# EAGLE board ControlModule (EAGLE 7.2.0)
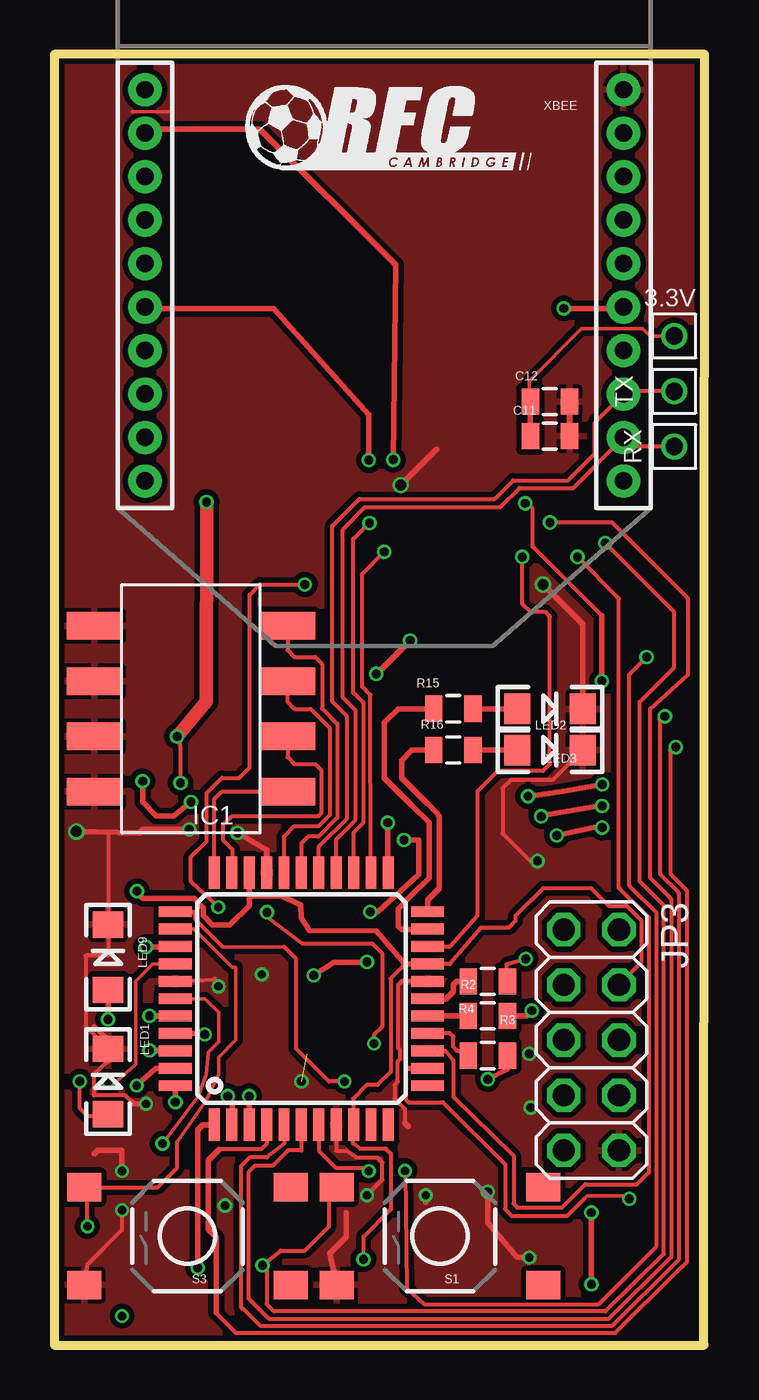
[diagram p0: board, top side]
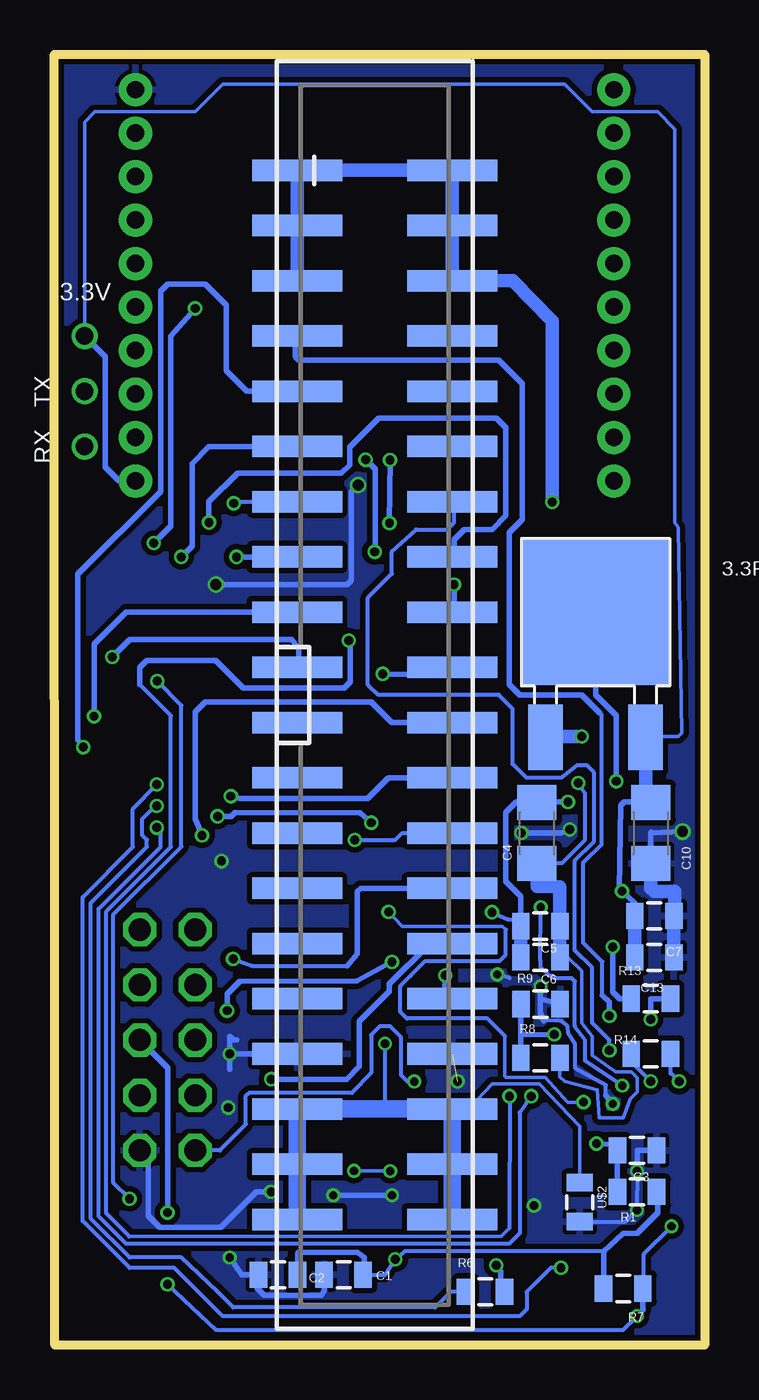
[diagram p1: board, bottom side, seen from below]

Size 29.9 x 59.38 mm. Coordinates in mm from the lower left corner, seen from the top.
Outline: 0,59.38 0,0 29.87,0 29.9,59.38 0,59.38
Copper layers (1*16): Top 0.018mm / dielectric 1.55mm / Bottom 0.018mm
Design rules "eC_2Layer_PClass6_BaseCopperO18_eCDefault": minimum track width 0.15mm, minimum drill 0.35mm, track to track 0.15mm, track to pad 0.15mm, pad to pad 0.15mm, via to via 0.15mm, smd to smd 0mil, copper to edge 0.25mm, drill to drill 0.35mm, minimum pad ring 0.175mm, minimum via ring 0.125mm, stop-mask expansion 0mil, vias tented up to drill 0.45mm, thermal gap 0.2mm

## Footprints (pad centres in the part's own frame; a part is rotated, then mirrored left to right if it is on the bottom)
DPAK = smd 6.7 x 6.7: DRAIN 0,0 | smd 3 x 1.6: GATE 5.75,-2.3; SOURCE 5.75,2.3
TESTING_PT = drill 0.8: P$1 0,0
0805 = smd 0.8 x 1.2: 1 -0.9,0; 2 0.9,0
1206 = smd 1.6 x 1.8: 1 -1.4,0; 2 1.4,0
TQFP44 = smd 1.5 x 0.5: 1 -5.8,4; 2 -5.8,3.2; 3 -5.8,2.4; 4 -5.8,1.6; 5 -5.8,0.8; 6 -5.8,0; 7 -5.8,-0.8; 8 -5.8,-1.6; 9 -5.8,-2.4; 10 -5.8,-3.2; 11 -5.8,-4; 23 5.8,-4; 24 5.8,-3.2; 25 5.8,-2.4; 26 5.8,-1.6; 27 5.8,-0.8; 28 5.8,0; 29 5.8,0.8; 30 5.8,1.6; 31 5.8,2.4; 32 5.8,3.2; 33 5.8,4 | smd 0.5 x 1.5: 12 -4,-5.8; 13 -3.2,-5.8; 14 -2.4,-5.8; 15 -1.6,-5.8; 16 -0.8,-5.8; 17 0,-5.8; 18 0.8,-5.8; 19 1.6,-5.8; 20 2.4,-5.8; 21 3.2,-5.8; 22 4,-5.8; 34 4,5.8; 35 3.2,5.8; 36 2.4,5.8; 37 1.6,5.8; 38 0.8,5.8; 39 0,5.8; 40 -0.8,5.8; 41 -1.6,5.8; 42 -2.4,5.8; 43 -3.2,5.8; 44 -4,5.8
2X20_SHROUDED_SMT = smd 4.14 x 0.991: 1 -3.569,24.13; 2 3.569,24.13; 3 -3.569,21.59; 4 3.569,21.59; 5 -3.569,19.05; 6 3.569,19.05; 7 -3.569,16.51; 8 3.569,16.51; 9 -3.569,13.97; 10 3.569,13.97; 11 -3.569,11.43; 12 3.569,11.43; 13 -3.569,8.89; 14 3.569,8.89; 15 -3.569,6.35; 16 3.569,6.35; 17 -3.569,3.81; 18 3.569,3.81; 19 -3.569,1.27; 20 3.569,1.27; 21 -3.569,-1.27; 22 3.569,-1.27; 23 -3.569,-3.81; 24 3.569,-3.81; 25 -3.569,-6.35; 26 3.569,-6.35; 27 -3.569,-8.89; 28 3.569,-8.89; 29 -3.569,-11.43; 30 3.569,-11.43; 31 -3.569,-13.97; 32 3.569,-13.97; 33 -3.569,-16.51; 34 3.569,-16.51; 35 -3.569,-19.05; 36 3.569,-19.05; 37 -3.569,-21.59; 38 3.569,-21.59; 39 -3.569,-24.13; 40 3.569,-24.13
2X05 = drill 1.016 octagon: 1 -5.08,-1.27; 2 -5.08,1.27; 3 -2.54,-1.27; 4 -2.54,1.27; 5 0,-1.27; 6 0,1.27; 7 2.54,-1.27; 8 2.54,1.27; 9 5.08,-1.27; 10 5.08,1.27
LED-1206 = smd 1.2 x 1.4: A -1.5,0; C 1.5,0
TACTILE-SWITCH-SMD = smd 1.55 x 1.3: 1 -4.75,2.25; 2 4.75,2.25; 3 -4.75,-2.25; 4 4.75,-2.25
4-POS-DIP-SMD = smd 1.27 x 2.54: 1 -3.81,4.445; 2 -1.27,4.445; 3 1.27,4.445; 4 3.81,4.445; 5 3.81,-4.445; 6 1.27,-4.445; 7 -1.27,-4.445; 8 -3.81,-4.445
XBEE-1 = drill 0.8 pad 1.524: 1 -11,20; 2 -11,18; 3 -11,16; 4 -11,14; 5 -11,12; 6 -11,10; 7 -11,8; 8 -11,6; 9 -11,4; 10 -11,2; 11 11,2; 12 11,4; 13 11,6; 14 11,8; 15 11,10; 16 11,12; 17 11,14; 18 11,16; 19 11,18; 20 11,20

## Placement (x,y rotation side)
3.3REG  3.3REG1AREG  [DPAK]  5.01,33.72 270 bottom
3.3V  TEST_PT  [TESTING_PT]  28.51,46.42 0 top
C1  1uF  [0805]  16.6,3.24 180 bottom
C2  0.01uF  [0805]  19.62,3.24 180 bottom
C3  0.1uF  [0805]  3.11,8.95 180 bottom
C4  47uF  [1206]  7.71,23.56 90 bottom
C5  1uF  [0805]  7.55,19.27 180 bottom
C6  0.01uF  [0805]  7.55,17.84 180 bottom
C7  0.01uF  [0805]  2.31,19.75 0 bottom
C10  47uF  [1206]  2.47,23.56 270 bottom
C11  0.01uF  [0805]  22.79,41.82 180 top
C12  1uF  [0805]  22.79,43.4 180 top
C13  1uF  [0805]  2.31,17.84 0 bottom
FRAME1  FRAME-LETTER  [CREATIVE_COMMONS]  -115.64,74.36 0 top  (outside the outline)
IC1  XMEGA16A4A  [TQFP44]  11.36,15.94 90 top
JP1  M20X2SHROUDED_SMT  [2X20_SHROUDED_SMT]  15.17,29.91 0 bottom
JP3  DEBUG  [2X05]  24.7,14.03 270 top
LED1  [LED-1206]  2.47,12.13 90 top
LED2  [LED-1206]  22.79,29.27 0 top
LED3  [LED-1206]  22.79,27.37 0 top
LED9  [LED-1206]  2.47,17.84 90 top
R1  10k  [0805]  3.11,7.05 0 bottom
R2  4.7k  [0805]  19.93,15.15 0 top
R3  4.7k  [0805]  19.93,13.32 0 top
R4  4.7k  [0805]  19.93,16.73 0 top
R6  4.7k  [0805]  10.09,2.45 0 bottom
R7  10k  [0805]  3.74,2.6 180 bottom
R8  80.6k  [0805]  7.55,13.21 0 bottom
R9  20k  [0805]  7.54,15.69 180 bottom
R13  1k  [0805]  2.47,15.94 180 bottom
R14  1k  [0805]  2.47,13.4 180 bottom
R15  1k  [0805]  18.34,29.27 180 top
R16  1k  [0805]  18.34,27.37 180 top
RX  TEST_PT  [TESTING_PT]  28.51,41.34 90 top
S1  TAC_SWITCHSMD  [TACTILE-SWITCH-SMD]  17.73,5.02 180 top
S3  TAC_SWITCHSMD  [TACTILE-SWITCH-SMD]  6.12,5.02 180 top
TX  TEST_PT  [TESTING_PT]  28.51,43.88 90 top
U$1  4-POS-DIP  [4-POS-DIP-SMD]  6.28,29.27 270 top
U$2  INDUCTOR  [0805]  5.73,6.58 270 bottom
XBEE  XBEE-1B1  [XBEE-1]  15.17,59.75 180 top

## Library data of the parts
3.3REG 3.3V RX TX U$2 = gen3
C1-C7 C10-C13 = SparkFun-Capacitors
FRAME1 = SparkFun-Aesthetics
IC1 = atmel; OC_FARNELL: unknown; OC_NEWARK: unknown
JP1 = SparkFun-Connectors
JP3 = pinhead
LED1-LED3 LED9 = SparkFun-LED
R1 R6-R9 R13-R16 = SparkFun-Passives
R2-R4 = SparkFun-Resistors
S1 S3 = SparkFun-Retired; PROD_ID: SWCH-08247
U$1 = SparkFun-Electromechanical; PROD_ID: SWCH-12418
XBEE = SparkFun-RF

## Nets
3.3V: 3.3REG.SOURCE 3.3V.P$1 C1.1 C2.1 C7.1 C10.1 C11.2 C12.2 C13.1 IC1.9 IC1.19 IC1.31 JP3.4 R1.2 R7.2 XBEE.1
12V: 3.3REG.GATE C4.1 C5.1 C6.1 JP1.1 JP1.2 JP1.3 JP1.4 JP1.5 JP1.6 R8.2
12VGND: 3.3REG.DRAIN C4.2 C5.2 C6.2 JP1.35 JP1.36 JP1.37 JP1.38 JP1.39 JP1.40 U$2.1
AVCC: C3.2 IC1.39 R1.1
BATSENSE: IC1.41 R8.1 R9.2
BB_IN: IC1.40 JP1.7
BB_OUT: IC1.4 JP1.9
BID0: IC1.28 U$1.1
BID1: IC1.29 U$1.2
BID2: IC1.32 U$1.3
BID3: IC1.33 U$1.4
CHARGE: IC1.7 JP1.19
CHARGE_DONE: IC1.5 JP1.17
CHIP_ENABLE: IC1.13 JP1.13
CTS: IC1.24 XBEE.12
DATA: IC1.34 JP3.9
DISCHARGE: IC1.6 JP1.16
DIVCAP: IC1.42 JP1.14
DRIB: IC1.43 JP1.18
GLED1: IC1.36 R13.2
GLED2: IC1.21 R15.2
GND: C1.2 C2.2 C3.1 C7.2 C10.2 C11.1 C12.1 C13.2 IC1.8 IC1.18 IC1.30 IC1.38 JP1.33 JP1.34 JP3.10 LED1.C LED2.C LED3.C LED9.C R9.1 S1.2 S3.2 U$1.5 U$1.6 U$1.7 U$1.8 U$2.2 XBEE.10
KICK_ENABLE: IC1.14 JP1.11
KICK_REF: IC1.20 JP1.15
MISO: IC1.16 R2.1
MOSI: IC1.15 R3.1
N$1: JP1.32 R2.2
N$2: LED9.A R13.1
N$3: JP1.30 R3.2
N$5: IC1.23 R6.1
N$8: JP1.28 R4.2
N$9: LED1.A R14.1
N$10: LED2.A R15.1
N$11: LED3.A R16.1
RESET: IC1.35 JP3.6 R7.1 S3.4
RLED1: IC1.37 R14.2
RLED2: IC1.22 R16.2
RTS: IC1.25 XBEE.16
RX: IC1.26 RX.P$1 XBEE.2
SCK: IC1.17 R4.1
SS_1: IC1.3 JP1.20
SS_2: IC1.2 JP1.22
SS_3: IC1.1 JP1.24
SS_4: IC1.44 JP1.26
TX: IC1.27 TX.P$1 XBEE.3
XBRST: R6.2 S1.4 XBEE.5

## Tracks (layer width: path | path; a pad name or v marks a point on that pad's centre or on a via)
3.3V  (via drill 0.41 pad 0.25)
  Top 0.152: 3.3V.P$1 27.39,46.42 27.06,46.75 24.23,46.75 21.84,44.36 21.84,43.61
  Top 0.178: 16.13,17.54 15.46,16.86 15.46,12.58 14.85,11.97 14.38,11.97 13.74,11.34 13.74,10.16 | v14.22,3.95 14.22,4.99 15.47,6.24 15.47,8.81 15.25,9.03 14.06,9.03 13.74,9.27 13.74,10.12 | 17.17,17.53 18.19,17.53 19.62,19.19 20.88,19.19 21.2,19.51 21.2,19.75 22.47,21.02 24.7,21.02 25.5,20.21 26.31,20.21 26.99,19.53 26.99,17.6 JP3.4
  Top 0.254: 21.84,43.61 C12.2 C11.2 | 8.96,20.88 8.98,20.54 | 13.74,10.16 IC1.9 13.74,10.12 | IC1.31 8.96,20.88 | 8.96,20.67 8.96,20.21 8.08,19.32 7.27,19.32 7.27,19.34 6.85,19.76 6.85,20.12 6.43,20.54 4.06,20.54 v3.8,20.89 | 17.17,17.53 IC1.19 16.13,17.54 16.11,17.54 14.8,19.07 11.72,19.07 11.35,19.64 11.34,20.25 10.44,20.67 8.96,20.67 | 8.96,20.67 8.96,20.88
  Bottom 0.152: 3.3V.P$1 28.51,56.26 28.03,56.75 23.43,56.75 22.16,58.01 6.44,58.01 5.17,56.75 2.15,56.75 1.36,55.94 1.36,37.85 1.2,37.61 1.04,28.16 1.2,28 2.68,28
  Bottom 0.178: C1.1 14.69,3.24 v14.22,3.95 13.82,4.27 13.77,4.32 4.64,4.32
  Bottom 0.254: R7.2 4.64,4.32 3.74,5.14 3.11,5.14 2.15,6.1 2.15,7 R1.2 | C7.1 3.21,20.33 v3.8,20.89 3.91,21 3.85,24.84 3.7,24.99 2.5,24.99 | XBEE.1 26.92,39.75 27.55,40.39 27.55,45.47 3.3V.P$1 | 2.68,28 3.3REG.SOURCE | C2.1 18.72,4.22 18.66,4.27 15.96,4.27 15.65,4.03 15.65,3.29 C1.1
  Bottom 0.61: 3.3REG.SOURCE 2.71,25.2 2.5,24.99 C10.1 | C7.1 C13.1
12V  (via drill 0.41 pad 0.25)
  Top 0.178: v5.8,25.86 5.8,27.53 v5.65,28
  Top 0.61: v7,38.79 6.99,29.61 v5.65,28
  Bottom 0.152: C6.1 6.28,17.84 5.65,17.21 5.65,14.83 5.17,14.19 5.17,13.32 4.15,12.61 4.09,12.56 4.09,12.57 3.55,12.57 3.54,12.56 3.38,12.56 3.11,12.29 3.11,11.65 3.42,11.34 3.74,10.46 4.85,10.46 4.93,11.73 6.44,12.13 6.65,12.34 R8.2
  Bottom 0.178: v5.8,25.86 5.49,25.39 5.49,23.24 6.57,22.16 C4.1
  Bottom 0.61: C6.1 C5.1 6.65,20.6 6.65,21.07 7.69,21.1 7.69,21.61 C4.1 | JP1.5 JP1.3 JP1.1 JP1.2 JP1.4 JP1.6 8.82,48.96 6.99,47.11 v7,38.79 | v5.65,28 7.27,28 3.3REG.GATE
12VGND  (via drill 0.38, 0.41, 0.41 pad 0.25)
  Top 0.178: 14.69,14.19 v14.69,13.88 14.69,14.27 15.08,14.65 15.08,18.03 14.63,18.45 14.63,18.47 11.41,18.46 9.77,19.69 v9.78,19.91
  Top 0.254: v4.06,25.94 4.06,24.99 4.69,24.35 5.49,24.35 v6.28,24.99
  Bottom 0.152: U$2.1 5.73,10.06 7.59,12.01 9.75,12.01 10.84,10.86
  Bottom 0.178: 14.69,10.86 v14.69,13.88 | v9.78,19.91 9.06,19.59 8.42,19.59 | 10.84,10.86 JP1.36
  Bottom 0.254: 3.3REG.DRAIN 5.01,29.91 4.06,28.96 v4.06,25.94 | v6.28,24.99 7.52,24.99 C4.2 7.74,24.99 8.66,24.99 9.14,24.51 9.14,21.34 8.45,20.65 C5.2
  Bottom 0.406: 8.42,19.59 8.42,19.51 C5.2
  Bottom 0.61: C5.2 C6.2
  Bottom 0.813: JP1.39 JP1.37 JP1.35 14.69,10.86 JP1.36 JP1.38 JP1.40
AVCC  (via drill 0.41 pad 0.25)
  Top 0.152: 5.09,9.43 6.6,11.42 6.99,12.45 7.07,13.48 7.55,13.96 7.55,15.3 6.91,15.94 IC1.39
  Top 0.254: v4.97,9.27 5.09,9.43
  Bottom 0.254: R1.1 C3.2 4.01,9.22 v4.97,9.27
BATSENSE  (via drill 0.41 pad 0.25)
  Top 0.254: v6.91,14.29 6.91,14.34 IC1.41
  Bottom 0.254: R9.2 8.45,14.27 | R8.1 8.45,14.27 | 8.45,14.27 v6.91,14.29
BB_IN  (via drill 0.41 pad 0.25)
  Top 0.254: IC1.40 v4.38,15.14 v4.38,15.15
  Bottom 0.178: 4.69,16.1 4.69,17.64 5.59,18.53 5.59,22.19 4.73,23.04 4.73,29 4.81,29.08
  Bottom 0.254: v4.38,15.15 4.38,15.78 4.69,16.1 | 4.81,29.08 5.65,29.91 8.5,29.91 8.98,30.39 8.98,37.37 8.38,37.97 8.38,44.23 9.46,45.31 18.66,45.31 18.82,45.47 18.82,46.34 JP1.7
BB_OUT  (via drill 0.41 pad 0.25)
  Top 0.178: IC1.4 9.76,9.26 9.51,9.01 7.58,9.01 | 28.65,3.39 25.8,0.56 8.34,0.56 7.44,1.46 7.44,1.5 | 28.65,3.39 28.98,3.72 | 28.35,27.37 28.35,21.65 29.08,20.92 29.08,3.82 28.65,3.39
  Top 0.254: 28.35,27.37 v28.57,27.51 | 7.44,1.5 7.44,4.96 7.08,5.33 7.08,8.51 7.58,9.01
  Bottom 0.254: v28.57,27.51 28.82,27.85 28.82,35.47 25.01,39.28 25.01,48.48 24.7,48.8 22.95,48.8 22,47.85 22,44.83 21.04,43.88 JP1.9
BID0
  Top 0.178: U$1.1 10.73,31.97 11.04,31.66 12,31.66 12.31,31.34 12.31,29.28 13.02,28.58 13.02,24.26 12.15,23.4 11.68,23.4 11.36,23.08 IC1.28
BID1
  Top 0.178: IC1.29 10.56,23.39 11.04,23.88 12.15,23.88 12.66,24.38 12.66,28.4 11.79,29.27 11.04,29.27 10.73,29.59 U$1.2
BID2
  Top 0.178: U$1.3 10.73,27.05 11.04,26.73 12,26.73 12.27,26.46 12.27,24.47 12.14,24.34 8.17,24.34 7.75,23.92 7.75,23.25 8.19,22.81 8.19,21.76
  Top 0.254: 8.19,21.76 IC1.32
BID3
  Top 0.178: IC1.33 7.36,25.12 7.71,25.46 U$1.4
CHARGE  (via drill 0.38, 0.41 pad 0.25)
  Top 0.178: IC1.7 12.16,8.95 12.95,8.16 14.3,8.16 v14.45,8 | v16.12,8.02 16.2,2.6 17.01,1.88 25.03,1.88 27.67,4.52 27.67,19.9 26.44,21.13 26.44,30.86 v27.24,31.66
  Bottom 0.178: v14.45,8 v16.12,8.02
  Bottom 0.254: v27.24,31.66 26.44,32.45 18.98,32.45 18.66,32.06 18.66,31.26 JP1.19
CHARGE_DONE  (via drill 0.41 pad 0.25)
  Top 0.178: IC1.5 10.56,9.27 9.77,8.64 8.98,8.64 8.57,8.23 8.57,1.74 8.66,1.65 8.71,1.65 9.47,0.89 25.66,0.89 28.66,3.87 28.71,3.92 28.71,20.82 27.87,21.65 27.87,28.8
  Top 0.254: 27.87,28.8 v28.07,28.93
  Bottom 0.254: JP1.17 26.6,33.72 28.07,32.25 v28.07,28.93
CHIP_ENABLE  (via drill 0.41 pad 0.25)
  Top 0.152: 24.38,6.73 24.51,6.87 26.31,6.87 v26.44,6.73
  Top 0.178: 24.38,6.73 23.58,5.94 21.04,5.94 20.73,6.26 20.73,8.32 17.87,11.18 16.28,11.18 16.16,11.29 16.16,12.65 16.26,12.74 | 25.17,33.56 22,36.74 22,38.48 21.75,38.73 v21.65,38.73
  Top 0.254: IC1.13 16.26,12.74 | v25.17,30.54 25.17,33.56
  Bottom 0.178: v25.17,30.54 24.06,29.43 24.06,22.92 27.18,19.81 27.18,7.47 v26.44,6.73 | v21.65,38.73 21.65,38.8 JP1.13
CTS  (via drill 0.41)
  Top 0.178: IC1.24 14.54,29.91 14.15,30.29 14.15,35.48 v15.17,36.5
  Top 0.254: XBEE.12 4.36,55.94 9.45,55.94 15.69,49.71 v15.59,40.73
  Bottom 0.254: v15.17,36.5 15.14,36.56 15.14,36.72 15.14,40.29 15.55,40.7 v15.59,40.73
DATA  (via drill 0.38)
  Top 0.178: IC1.34 6.41,19.94 6.44,19.91 6.46,19.61 7.73,18.34 10.57,18.32 11.12,17.77 11.12,13.63 12.63,12.13 v13.34,12.13
  Bottom 0.178: v13.34,12.13 13.66,12.13 13.95,12.42 13.95,14.16 14.46,14.67 14.93,14.67 15.33,14.27 15.33,12.53 16.21,11.6 20.92,11.61 21.09,11.49 21.09,10.16 22.29,8.96 JP3.9
DISCHARGE  (via drill 0.41 pad 0.25)
  Top 0.178: IC1.6 11.36,8.95 10.73,8.95 10.73,8.93 10.06,8.27 9.24,8.27 8.92,7.94 8.92,2.17 9.87,1.22 25.5,1.22 28.35,4.03 28.37,4.05 28.37,20.52 27.39,21.5 27.39,29.27 29.14,30.86 29.14,34.35 25.65,37.85 v22.79,37.85
  Bottom 0.254: v22.79,37.85 22.79,38.8 21.48,40.11 16.7,40.11 16.31,40.5 16.31,41.32 14.99,42.64 9.57,42.64 9.14,42.21 9.14,39.44 9.14,39.43 9.14,38.16 9.77,37.53 11.04,37.53 11.52,37.05 11.52,36.34 JP1.16
DIVCAP  (via drill 0.41 pad 0.25)
  Top 0.254: IC1.42 5.56,13.56 v4.38,13.56
  Bottom 0.178: v4.38,13.56 4.38,14.03 5.17,14.83 5.17,17.37 5.96,18.16 5.96,22.29 5.1,23.15 5.1,26.37 5.39,26.66 5.88,26.66 6.6,26.1 8.19,26.1 8.82,26.73 8.82,29.27 9.45,29.91 15.01,29.91 15.48,30.38 15.48,34.39 14.38,35.49 14.38,36.5 13.27,37.53 11.84,37.53 11.52,37.85 11.52,38.72
  Bottom 0.254: 11.52,38.72 JP1.14
DRIB  (via drill 0.38 pad 0.25, 0.41 pad 0.25)
  Top 0.178: v11.52,34.99 9.45,34.99 8.98,34.51 8.98,26.58 8.5,26.1 7.71,26.1 6.99,25.38 6.99,23.16 6.28,22.45 6.28,21.34 v7.53,20.15
  Top 0.254: IC1.43 4.67,12.74 v3.79,11.94
  Bottom 0.178: v3.79,11.94 5.49,13.08 5.49,14.03 5.96,14.67 5.96,16.73 6.12,16.89 6.9,16.89 7.01,17 7.15,17 7.55,17.4 | v7.53,20.15 7.55,17.69 7.55,17.4 | 7.55,17.4
  Bottom 0.254: v11.52,34.99 11.52,33.8 JP1.18
GLED1  (via drill 0.41 pad 0.25)
  Top 0.254: v4.22,18.32 5.54,18.32 IC1.36
  Bottom 0.254: R13.2 3.9,15.94 4.22,16.26 v4.22,18.32
GLED2
  Top 0.254: IC1.21 17.13,19.11 15.96,19.11 15.8,19.27 15.8,20.07 16.44,20.7 17.23,21.5 17.23,24.04 16.44,24.83 15.17,26.1 15.17,28.64 15.8,29.27 R15.2
GND  (via drill 0.38, 0.38 pad 0.25, 0.41, 0.41 pad 0.25, 0.5)  (1 unrouted)
  Top 0.152: 3.58,56.75 5.33,56.75
  Top 0.178: IC1.38 7.38,16.82 | IC1.18 15.97,16.74 15.8,16.57 15.8,13.66 15.9,13.56 15.9,13.16 15.8,13.06 15.8,12.13 15.65,11.97 15.65,11.34 16.12,10.86 16.12,10.22 | 2.47,13.08 1.82,12.45 1.82,11.5 1.83,11.48 3.27,11.48 3.58,11.18 | v1.01,23.62 2.47,23.56 2.47,17.92 1.44,17.92 1.44,14.66 LED1.C | S3.2 1.53,3.73 3.11,5.3 v3.11,6.22 | IC1.8 12.96,8.94 13.44,8.94 13.9,8.64 14.85,8.64 15.09,8.4 15.09,7.62 14.38,6.9 v14.38,6.89 | LED3.C 22.93,26.01 21,26.01 20.62,25.63 20.62,23.54 21.89,22.27 v22.22,22.27
  Top 0.254: C11.1 C12.1 | IC1.30 9.76,22.78 v8.42,23.56 | v6.2,23.72 4.06,23.72 3.9,23.56 v1.01,23.62 | v3.11,8 3.11,8.95 1.99,8.95 1.84,8.8 | 7.38,16.82 v7.55,16.5 | 1.82,14.64 2.47,14.03 LED1.C 2.47,13.08 | 16.12,10.22 16.28,10.07 | v21.84,4.03 21.28,4.03 19.93,5.62 v19.93,7.05 | S1.2 12.67,4.23 13.42,4.99 13.42,6.1 | v17.08,6.89 17.08,6.57 | v4.22,11.1 3.66,11.1 3.58,11.18 | LED2.C 24.29,33.17 v22.47,34.99 | v15.93,39.56 17.58,41.21
  Bottom 0.178: 8.98,16.89 v9.53,17.05 | 4.53,11.49 4.53,11.97 5.96,12.76 5.96,13.88 6.27,14.35 6.29,14.65 6.55,14.89 6.86,14.93 7.39,14.91 | C13.2 1.36,17.84 1.36,20.86 2.47,20.86 2.47,23.64 | v3.11,8 v3.11,6.22 3.65,5.68 U$2.2
  Bottom 0.254: 21.52,14.03 21.68,14.03 21.84,14.19 v21.84,13.4 | 21.84,12.69 v21.84,13.4 | v21.84,13.4 JP1.33 | v8.42,23.56 6.6,23.56 v6.2,23.72 | v1.01,23.62 2.47,23.56 C10.2 | C3.1 3.11,8.95 v3.11,8 | v7.55,16.5 7.55,15.94 | 7.55,15.94 R9.1 | 7.55,15.94 7.55,15.3 7.39,14.91 | v4.22,11.1 4.53,11.49 | v19.93,7.05 20.61,7.05 22.24,5.42 25.05,5.42 25.57,5.95 25.57,8.56 JP3.10 | C1.2 17.5,2.5 17.63,2.29 20.25,2.29 20.57,2.6 20.57,3.5 C2.2 21.28,3.24 v21.84,4.03 | v14.38,6.89 v17.08,6.89 | v22.47,34.99 16.44,34.99 16.25,35.18 16.25,39.24 v15.93,39.56
  Bottom 0.61: C10.2 2.47,21.02 2.31,20.86 1.36,20.86 1.36,19.8 C7.2 C13.2
  other vias: 11.36,12.13 7.85,6.42 21.91,10.92
  pour Bottom (isolate 0.254): 0.19,0.44 29.38,0.56 29.51,58.98 0.5,58.98
  pour Top (isolate 0.254): 29.36,0.56 0.15,0.47 0.48,58.98 29.49,58.98
KICK_ENABLE  (via drill 0.41 pad 0.25)
  Top 0.178: IC1.14 17.97,13.54 18.34,13.08 18.34,11.42 21.04,8.8 21.12,8.72 21.12,6.5 21.28,6.34 23.35,6.34 24.42,7.41 26.79,7.41 27.32,7.94 27.34,7.94 27.34,19.67 25.99,21.02 25.97,21.02 25.97,34.35 v24.06,36.26
  Bottom 0.254: JP1.11 22.79,41.34 23.57,40.56 23.57,36.75 v24.06,36.26
KICK_REF  (via drill 0.41 pad 0.25)
  Top 0.178: IC1.20 18.2,18.34 19.46,19.75 19.46,25.48 20.38,26.4 22.46,26.4 22.79,26.73 22.79,33.53 22.6,33.72 21.9,33.72 21.52,34.1 v21.52,36.26
  Bottom 0.254: v21.52,36.26 JP1.15
MISO
  Top 0.254: IC1.16 R2.1
MOSI
  Top 0.178: R3.1 18.5,13.56 18.34,13.72 18.34,14.19 18.19,14.35 17.17,14.35
  Top 0.254: 17.17,14.35 IC1.15
N$1  (via drill 0.41 pad 0.25)
  Top 0.254: R2.2 21.71,15.15 v21.95,15.39 | v14.38,17.63 14.11,17.62 13.99,17.6 12.84,17.6 v11.93,17.01
  Bottom 0.254: v21.95,15.39 21.95,16.15 21.37,16.74 16,16.74 v14.38,17.63 | v11.93,17.01 11.94,16.28 JP1.32
N$2  (via drill 0.41 pad 0.25)
  Top 0.254: LED9.A v2.47,14.99
  Bottom 0.254: v2.47,14.99 2.47,15.94 R13.1
N$3  (via drill 0.41 pad 0.25)
  Top 0.254: R3.2 20.84,12.7 v19.93,12.23
  Bottom 0.254: v19.93,12.23 16.46,12.22 15.87,12.82 15.87,14.9 14.49,16.28 14.49,16.61 12.71,18.39 11.69,18.39 JP1.30
N$5  (via drill 0.41 pad 0.25)
  Top 0.254: v22.39,24.33 22.7,24.42 25.16,24.83 v25.19,24.8 | v15.33,24.04 15.33,21.87 IC1.23
  Bottom 0.178: R6.1 11.68,2.45 12.39,1.73 21.68,1.73 22.39,2.45 24.06,4.03 26.44,4.03 28.22,5.81 28.22,20.35 25.65,22.92 25.65,23.24 25.88,23.47 25.88,24.19 25.26,24.8 v25.19,24.8
  Bottom 0.254: v22.39,24.33 21.77,24.33 21.58,24.51 15.84,24.48 v15.33,24.04
N$8  (via drill 0.41 pad 0.25)
  Top 0.178: R4.2 20.81,17.53 v21.68,17.77
  Bottom 0.178: v21.68,17.77 20.81,17.45 16.44,17.45
  Bottom 0.254: 16.44,17.45 15.96,18 15.96,20.86 15.8,21.02 JP1.28
N$9  (via drill 0.41 pad 0.25)
  Top 0.178: 2.38,10.54 1.52,10.54 1.17,10.89 v1.17,12.13
  Top 0.254: 2.38,10.54 LED1.A
  Bottom 0.178: R14.1 1.57,12.5 1.54,12.5 v1.17,12.13
N$10
  Top 0.254: R15.1 LED2.A
N$11
  Top 0.254: R16.1 LED3.A
RESET  (via drill 0.38, 0.41 pad 0.25)
  Top 0.152: IC1.35 6.41,19.14 8.19,17.37 8.34,17.37 8.34,14.03 7.55,13.24 7.55,12.45 6.99,11.26 5.65,9.35
  Top 0.178: v1.52,5.46 1.52,7.25 S3.4 4.75,7.27 5.65,8.16 5.65,9.35
  Top 0.254: v24.7,6.1 v24.7,2.8
  Bottom 0.178: v24.7,2.8 22.47,0.7 3.74,0.7 v3.11,1.33 2.79,1.65 2.79,4.19 v1.52,5.46
  Bottom 0.254: R7.1 2.84,1.6 v3.11,1.33 | v24.7,6.1 24.7,12.76 JP3.6
RLED1  (via drill 0.41)
  Top 0.152: v2.47,12.13 2.87,12.13 3.74,12.92 3.74,16.73 4.53,17.53 5.55,17.53
  Top 0.254: 5.55,17.53 IC1.37
  Bottom 0.178: 3.37,13.03 v2.47,12.13
  Bottom 0.254: R14.2 3.37,13.03
RLED2
  Top 0.254: IC1.22 17.16,20.47 17.71,21.02 17.71,24.35 17.55,24.51 17.16,24.91 17.15,24.91 15.96,26.1 15.96,26.89 16.44,27.37 R16.2
RTS  (via drill 0.41)
  Top 0.178: IC1.25 13.76,23.58 14.2,24.02 14.2,29.56 13.74,30.02 13.74,37.09 v14.49,37.82
  Top 0.254: v14.46,40.71 14.46,42.81 10.09,47.69 4.23,47.69 XBEE.16
  Bottom 0.254: v14.49,37.82 v14.46,40.71
RX
  Top 0.178: RX.P$1 26.59,41.34 XBEE.2 23.85,39.43 21.39,39.43 20.5,38.55 14.28,38.55 13.27,37.53 13.27,29.79 13.83,29.22 13.83,24.13 12.96,23.25 IC1.26
SCK
  Top 0.254: R4.1 18.5,16.73 18.34,16.57 18.34,16.26 18.03,15.94 IC1.17
SS_1  (via drill 0.41 pad 0.25)
  Top 0.254: IC1.3 8.96,11.16 v8.97,11.45 | v14.8,30.88 14.82,30.88 v16.36,32.42
  Bottom 0.152: 8.98,5.38 9.35,5.01 9.35,5 26.46,5
  Bottom 0.178: v8.97,11.45 8.98,5.38 | 25.97,30.39 24.54,28.96 24.54,22.92 27.51,19.95 27.51,6.05 26.46,5
  Bottom 0.254: 25.97,30.39 25.97,31.18 25.65,31.5 22.47,31.5 21.2,30.23 16.57,30.23 16.29,30.5 16.29,32.35 v16.36,32.42 | v14.8,30.88 11.92,30.86 JP1.20
SS_2  (via drill 0.41 pad 0.25)
  Top 0.254: IC1.2 8.19,11.18 8.16,11.2 7.92,11.47 v7.97,11.45 | v23.11,23.44 25.12,23.88 v25.19,23.81
  Bottom 0.178: v7.97,11.45 8.19,11.18 8.5,10.7 8.5,5.14 8.98,4.67 26.6,4.67 27.86,5.93 27.86,20.07 25.01,22.92 25.01,23.72 v25.19,23.81
  Bottom 0.254: v23.11,23.44 23.43,24.19 23.43,29.12 22.95,29.59 15.33,29.59 14.38,28.64 JP1.22
SS_3  (via drill 0.41 pad 0.25)
  Top 0.254: IC1.1 6.83,10.14 6.6,9.91 v6.6,3.56 | v25.19,25.79 23.36,25.48 v21.78,25.25
  Bottom 0.178: v6.6,3.56 7.07,3.56 8.19,2.45 8.19,1.65 8.5,1.33 22.16,1.33 24.38,3.56 26.44,3.56 28.6,5.72 28.6,20.6 26.28,22.92 26.28,24.67 v25.19,25.79
  Bottom 0.254: v21.78,25.25 21.36,25.15 15.49,25.15 14.54,26.1 JP1.24
SS_4  (via drill 0.41 pad 0.25)
  Top 0.254: IC1.44 5.56,11.41 v5.57,11.18 | v14.53,19.93 14.87,19.94 16.76,21.65 16.76,23.24 v16.08,23.24
  Bottom 0.152: v5.57,11.18 6.28,11.18 7.32,12.32 9.13,12.32 9.18,12.37 9.18,14.23 | 9.14,19.11 9.3,19.27 13.91,19.27 v14.53,19.93
  Bottom 0.178: v16.08,23.24 14.22,23.24 13.9,23.56 JP1.26 | 9.18,14.23 9.98,15.03 13.68,15.03 13.99,15.33 13.99,16.52 13.52,16.98 12.83,17.67 9.43,17.67 9.15,17.95 9.15,19.1 9.14,19.11
TX
  Top 0.178: TX.P$1 26.3,43.88 XBEE.3 24.85,42.44 24.85,41.02 23.9,40.07 23.61,39.78 21.1,39.78 20.25,38.93 14.03,38.93 12.79,37.69 12.79,29.6 13.44,28.95 13.44,24.21 12.16,22.93 IC1.27
XBRST  (via drill 0.41)
  Top 0.178: v25.33,36.89 28.51,33.72 28.51,31.18 26.92,29.59 26.92,21.34 28.03,20.23 28.03,4.19 25.34,1.55 10.1,1.55 9.76,1.89 9.76,3.62 v9.57,3.67 10.41,4.35 11.52,4.35 12.63,5.46 12.63,7.23 S1.4
  Top 0.254: v23.43,47.69 26.11,47.69 XBEE.5
  Bottom 0.254: v25.33,36.89 24.54,37.69 24.54,46.42 v23.43,47.69 | R6.2 9.38,2.53 9.38,3.4 v9.57,3.67